# Altium PCB PCB1.pcbdoc
Units mil, origin at the board's own origin, x right, y up, seen from the top; angles counter-clockwise.
Board outline 3937.01 x 3543.31 mil, 2 copper layers (Top Layer, Bottom Layer); 47 components, 23 nets, 125 pads, 2 vias.
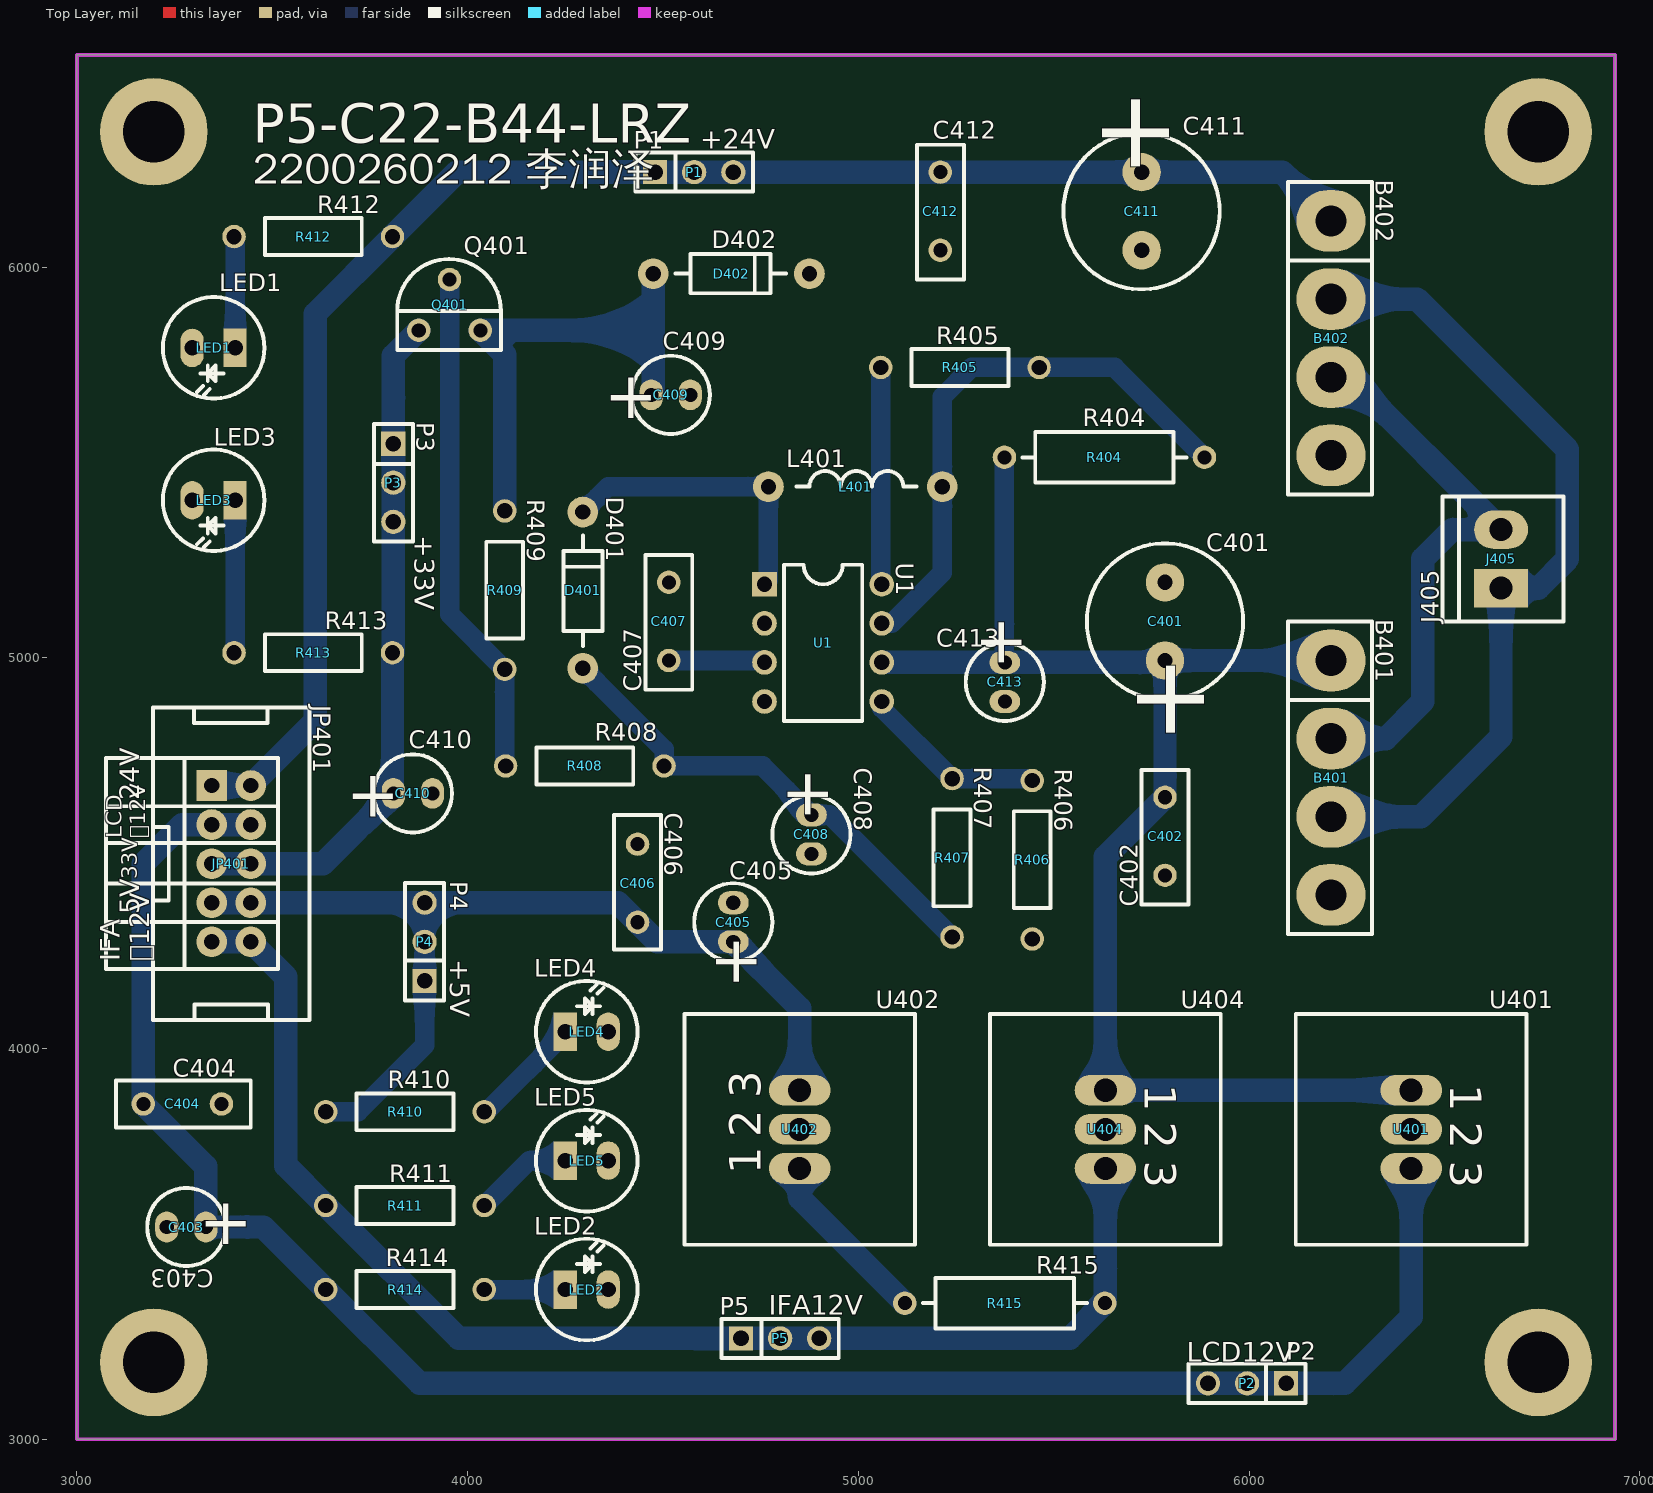
[diagram p0: Top Layer view]
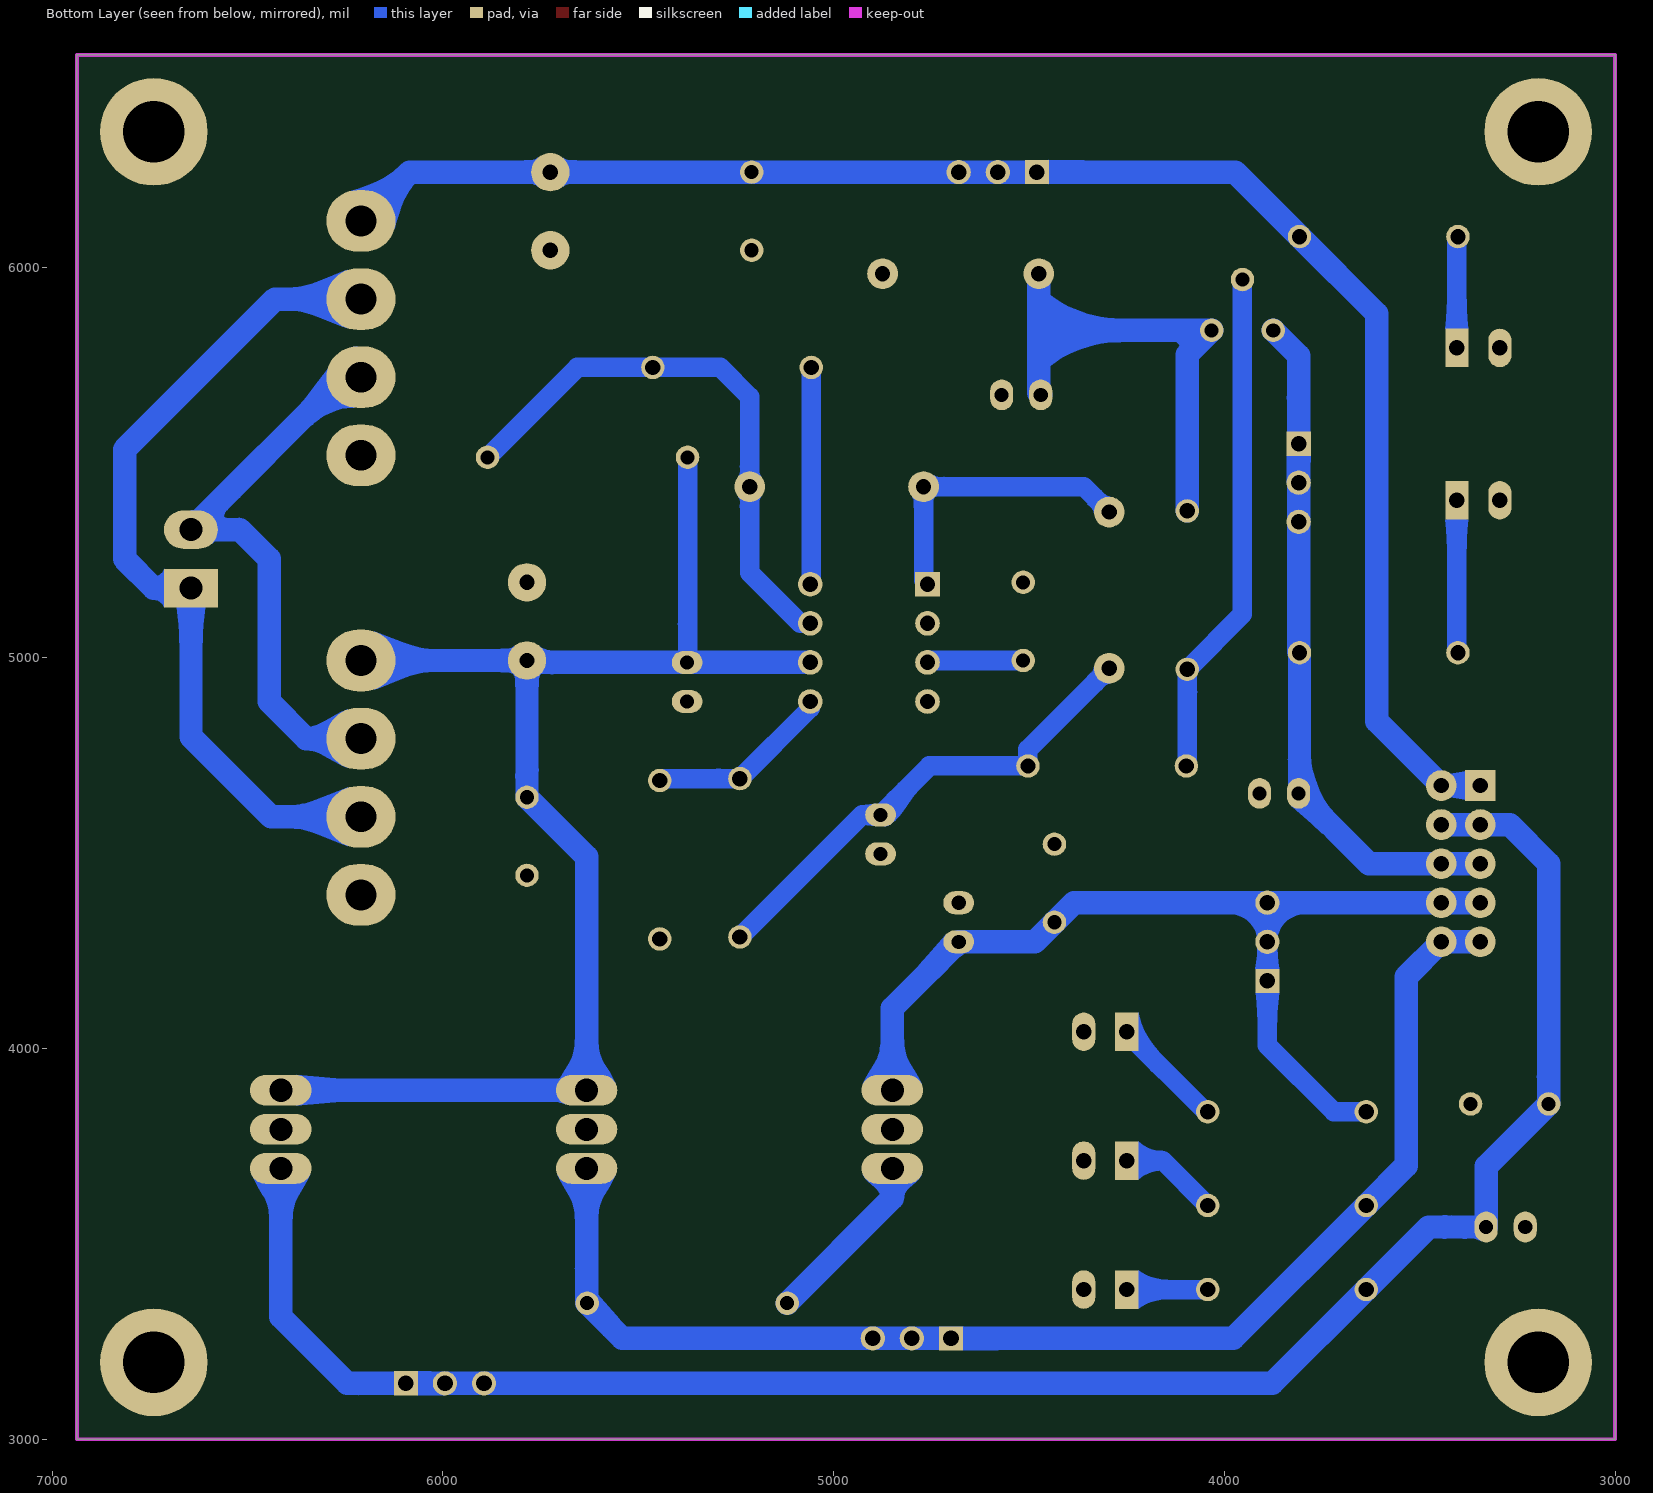
[diagram p1: Bottom Layer view, seen from below]

## Layer stack, top to bottom
Top Layer: signal copper (thickness not stored)
Dielectric: dielectric 12.6, FR-4, Dk 4.8
Bottom Layer: signal copper (thickness not stored)

## Board outline
3000,6543.31 6937.01,6543.31 6937.01,3000 3000,3000

## Design rules (kind name [scope] priority, off if disabled: settings)
BoardOutlineClearance copperThickness1oz [All] p0: genericclearance=10 ignorepadtopadclearanceinfootprint=FALSE except(0: Arc-SplitContinuation Track-SplitContinuation SMDPad-SplitContinuation THPad-SplitContinuation Via-SplitContinuation Fill-SplitContinuation Poly-SplitContinuation Region-SplitContinuation Text-SplitContinuation; 6: SMDPad-CutoutEdge THPad-CutoutEdge Via-CutoutEdge Fill-CutoutEdge Region-CutoutEdge; 11.8: Track-OutlineEdge SMDPad-OutlineEdge THPad-OutlineEdge Via-OutlineEdge Fill-OutlineEdge Region-OutlineEdge Poly-OutlineEdge Text-OutlineEdge Track-CutoutEdge)
BoardOutlineClearance copperThickness2oz [All] p0: genericclearance=10 ignorepadtopadclearanceinfootprint=FALSE except(0: Arc-SplitContinuation Track-SplitContinuation SMDPad-SplitContinuation THPad-SplitContinuation Via-SplitContinuation Fill-SplitContinuation Poly-SplitContinuation Region-SplitContinuation Text-SplitContinuation; 6: SMDPad-CutoutEdge THPad-CutoutEdge Via-CutoutEdge Fill-CutoutEdge Region-CutoutEdge; 11.8: Track-OutlineEdge SMDPad-OutlineEdge THPad-OutlineEdge Via-OutlineEdge Fill-OutlineEdge Region-OutlineEdge Poly-OutlineEdge Text-OutlineEdge Track-CutoutEdge)
Clearance copperThickness1oz [(InNet('+24V') OR InNet('$1N564') OR InNet('$1N466') OR InNet('GND') OR InNet('$1N1994') OR InNet('$1N1138') OR InNet('$1N1148') OR InNet('$1N846') OR InNet('$1N710') OR InNet('$1N1193') OR InNet('$1N1296') OR InNet('$1N1422') OR InNet('$1N1364') OR InNet('+33V') OR InNet('IFA12V') OR InNet('$1N1797') OR InNet('+5V') OR InNet('LCD12V') OR InNet('$1N3794') OR InNet('$1N3797') OR InNet('$1N3791') OR InNet('$1N3788') OR InNet('$1N3575'))] p1: gap=7 ignorepadtopadclearanceinfootprint=FALSE except(4: Track-Track; 6: Track-SMDPad SMDPad-SMDPad Track-THPad SMDPad-THPad THPad-THPad Track-Via SMDPad-Via THPad-Via Via-Via Track-Fill SMDPad-Fill THPad-Fill Via-Fill Fill-Fill SMDPad-Region THPad-Region Via-Region Fill-Region Region-Region Track-Poly SMDPad-Poly THPad-Poly Via-Poly Fill-Poly Poly-Poly Track-Text SMDPad-Text THPad-Text Via-Text Fill-Text Region-Text Poly-Text Text-Text Track-Hole SMDPad-Hole THPad-Hole Via-Hole Fill-Hole Region-Hole Poly-Hole Text-Hole; 11.8: Track-Region Region-Poly Track-Sheet SMDPad-Sheet THPad-Sheet Via-Sheet Fill-Sheet Region-Sheet Poly-Sheet Text-Sheet Sheet-Hole)
Clearance copperThickness2oz [All] p1: gap=7 ignorepadtopadclearanceinfootprint=FALSE except(6: Track-SMDPad SMDPad-SMDPad Track-THPad SMDPad-THPad THPad-THPad Track-Via SMDPad-Via THPad-Via Via-Via Track-Fill SMDPad-Fill THPad-Fill Via-Fill Fill-Fill SMDPad-Region THPad-Region Via-Region Fill-Region Region-Region Track-Poly SMDPad-Poly THPad-Poly Via-Poly Fill-Poly Poly-Poly Track-Text SMDPad-Text THPad-Text Via-Text Fill-Text Region-Text Poly-Text Text-Text Track-Hole SMDPad-Hole THPad-Hole Via-Hole Fill-Hole Region-Hole Poly-Hole Text-Hole; 8: Track-Track; 11.8: Track-Region Region-Poly Track-Sheet SMDPad-Sheet THPad-Sheet Via-Sheet Fill-Sheet Region-Sheet Poly-Sheet Text-Sheet Sheet-Hole)
DiffPairsRouting differentialPair [All] p1: maxuncoupledlength=10 minlimit=5.9843 maxlimit=5.9843 mostfreqgap=5.9843 toplayer_minwidth=5 toplayer_prefwidth=10 toplayer_maxwidth=100 bottomlayer_minwidth=5 bottomlayer_prefwidth=10 bottomlayer_maxwidth=100
PasteMaskExpansion pasteMaskExpansion [All] p1: expansion=0
PlaneConnect innerPlane [All] p1: planeconnectstyle=Relief reliefexpansion=20 reliefentries=4 reliefconductorwidth=10 reliefairgap=10
PolygonConnect copperRegion [All] p1: connectstyle=Relief reliefentries=4 reliefconductorwidth=10 polygonreliefangle="90 Angle" airgapwidth=10
PolygonConnect copperRegion1 [All] p1: connectstyle=Direct reliefentries=4 reliefconductorwidth=10 polygonreliefangle="90 Angle" airgapwidth=10
RoutingVias viaSize [All] p1: viastyle="Through Hole" holewidth=12.0078 minholewidth=11.811 maxholewidth=247.9922 width=24.0158 minwidth=19.685 maxwidth=393.7008
SolderMaskExpansion solderMaskExpansion [All] p1: useseparateexpansions=TRUE expansion=2.0079 expansionbottom=2.0079
Width copperThickness1oz [All] p1: maxlimit=100 minlimit=30 preferedwidth=40
Width copperThickness2oz [All] p1: maxlimit=100 minlimit=8 preferedwidth=10

## Components (designator, comment, footprint, x,y, rotation, side; value= is the part's Value field where it differs from the comment)
B401 "整流桥" B401/B402 6210,4993.31 r270 top
B402 "整流桥" B401/B402 6210,6118.31 r270 top
C401 "C_Ele_SMD_3x5.4mm" C401/C411 5785,4993.31 r90 top
C402 "CAP_0603" RAD-0.2 5785,4543.31 r90 top
C403 "C_Ele_SMD_3x5.4mm" 电解电容 3330,3543.31 r180 top
C404 "CAP_0603" RAD-0.2 3270,3858.31 r180 top
C405 "C_Ele_SMD_3x5.4mm" 电解电容 4680,4273.31 r90 top
C406 "CAP_0603" RAD-0.2 4435,4423.31 r270 top
C407 "CAP_0603" RAD-0.2 4515,5093.31 r90 top
C408 "C_Ele_SMD_3x5.4mm" 电解电容 4880,4598.31 r270 top
C409 "C_Ele_SMD_3x5.4mm" 电解电容 4470,5673.31 r0 top
C410 "C_Ele_SMD_3x5.4mm" 电解电容 3810,4653.31 r0 top
C411 "C_Ele_SMD_3x5.4mm" C401/C411 5725,6243.31 r270 top
C412 "CAP_0603" RAD-0.2 5210,6143.31 r90 top
C413 "C_Ele_SMD_3x5.4mm" 电解电容 5375,4988.31 r270 top
D401 "D_1N4007A" D401/D402 4295,5373.31 r270 top
D402 "D_1N4007A" D401/D402 4875,5983.31 r180 top
J405 "HDR-M_2.54_1x2P" J405 6645,5178.31 r90 top
JP401 "HDR-F_2.54_2x5" JP401 3345,4673.31 r270 top
L401 "L_0603" L401 4770,5438.31 r0 top
LED1 "LED_TH-R_3mm" LED 3405,5793.31 r180 top
LED2 "LED_TH-R_3mm" LED 4250,3383.31 r0 top
LED3 "LED_TH-R_3mm" LED 3405,5403.31 r180 top
LED4 "LED_TH-R_3mm" LED 4250,4043.31 r0 top
LED5 "LED_TH-R_3mm" LED 4250,3713.31 r0 top
P1 "HDR-F_2.54_1x3P" HDR-TH_3P-P2.54-V-F 4580,6243.31 r0 top
P2 "HDR-F_2.54_1x3P" HDR-TH_3P-P2.54-V-F 5995,3143.31 r180 top
P3 "HDR-F_2.54_1x3P" HDR-TH_3P-P2.54-V-F 3810,5448.31 r270 top
P4 "HDR-F_2.54_1x3P" HDR-TH_3P-P2.54-V-F 3890,4273.31 r90 top
P5 "HDR-F_2.54_1x3P" HDR-TH_3P-P2.54-V-F 4800,3258.31 r0 top
Q401 "S8050_SOT_NPN" Q401 3875,5838.31 r0 top
R404 "Res_AXIAL-1/4W" Res_1/2W 5630,5513.31 r180 top
R405 "Res_AXIAL-1/4W" Res_1/4W 5260,5743.31 r180 top
R406 "Res_AXIAL-1/4W" Res_1/4W 5445,4483.31 r270 top
R407 "Res_AXIAL-1/4W" Res_1/4W 5240,4488.31 r270 top
R408 "Res_AXIAL-1/4W" Res_1/4W 4300,4723.31 r180 top
R409 "Res_AXIAL-1/4W" Res_1/4W 4095,5173.31 r270 top
R410 "Res_AXIAL-1/4W" Res_1/4W 3840,3838.31 r0 top
R411 "Res_AXIAL-1/4W" Res_1/4W 3840,3598.31 r0 top
R412 "Res_AXIAL-1/4W" Res_1/4W 3605,6078.31 r180 top
R413 "Res_AXIAL-1/4W" Res_1/4W 3605,5013.31 r180 top
R414 "Res_AXIAL-1/4W" Res_1/4W 3840,3383.31 r0 top
R415 "Res_AXIAL-1/4W" Res_1/2W 5375,3348.31 r0 top
U1 "MC34063" DIP-8_L10.0-W6.5-P2.54-LS7.6-BL-A 4910,5038.31 r270 top
U401 "7812" U401/U402/U404 6415,3793.31 r270 top
U402 "7805" U401/U402/U404 4850,3793.31 r90 top
U404 "7812" U401/U402/U404 5632.5,3793.31 r270 top

## Footprints (in the part's own frame and the unit in brackets; to place one, negate y for a bottom-side part, rotate by r counter-clockwise, add the part's x,y. Pads: shape width x height; smd on the part's side, far side on the other; paste and mask are expansions set on the pad)
B401/B402 [mm]
  oval 4x4.5 hole 2: 1(15.24,0) 2(5.08,0) 3(0,0) 4(10.16,0)
  silkscreen extent -2.54,-2.79 17.78,2.67
C401/C411 [mm]
  round 2.5 hole 1: 1(0,0) 2(5.08,0)
  silkscreen extent -2.54,-5.08 7.62,5.08
D401/D402 [mm]
  round 2 hole 1: 1(10.16,0) 2(0,0)
  silkscreen extent 1.52,-1.27 8.7,1.27
DIP-8_L10.0-W6.5-P2.54-LS7.6-BL-A [mil]
  rect 63x63 hole 39.37: 1(-150,-150)
  round 63 hole 39.37: 2(-50,-150) 3(50,-150) 4(150,-150) 5(150,150) 6(50,150) 7(-50,150) 8(-150,150)
  silkscreen extent -200,-100 200,100
HDR-TH_3P-P2.54-V-F [mil]
  rect 62x62 hole 40.16: 1(-100,0)
  round 62 hole 40.16: 2(0,0) 3(100,0)
  silkscreen extent -150,-50 150,50
J405 [mm]
  rect 2.5x3.5 hole 1.5: 1(0,0)
  oval 2.5x3.5 hole 1.5: 2(3.81,0)
  silkscreen extent -2.16,-4.06 5.97,3.81
JP401 [mm]
  rect 2x2 hole 1: 1(0,0)
  round 2 hole 1: 2(0,2.54) 3(2.54,0) 4(2.54,2.54) 5(5.081,0) 6(5.081,2.54) 7(7.62,0) 8(7.62,2.54) 9(10.16,0) 10(10.16,2.54)
  silkscreen extent -5.08,-3.81 15.24,6.35
L401 [mm]
  round 2 hole 1: 1(0,0) 2(11.303,0)
  silkscreen extent 1.82,0 9.62,1.01
LED [mm]
  rect 1.5x2.5 hole 1: 1(0,0)
  oval 1.5x2.5 hole 1: 2(2.794,0)
  silkscreen extent -1.91,-3.3 4.7,3.3
Q401 [mil]
  round 60 hole 36: 1(0,0) 2(78.74,130) 3(157.48,0)
  silkscreen extent -55,-50 210,182
RAD-0.2 [mil]
  round 60 hole 36: 1(-100,0) 2(100,0)
  silkscreen extent -175,-60 170,60
Res_1/2W [mil]
  round 60 hole 36: 1(-255.91,0) 2(255.9,0)
  silkscreen extent -210,-65 210,65
Res_1/4W [mil]
  round 60 hole 39.37: 1(-202.76,0) 2(202.76,0)
  silkscreen extent -124,-47 124,47
U401/U402/U404 [mm]
  oval 2x4 hole 1.5: 1(-2.54,0) 2(0,0) 3(2.54,0)
  silkscreen extent -7.5,-7.5 7.5,7.5
电解电容 [mm]
  oval 1.5x2 hole 0.914: 1(0,0) 2(2.54,0)
  silkscreen extent -1.27,-2.54 3.81,2.54

## Free pads (board coordinates)
  round 275.59 hole 157.48: 1(3196.85,6346.46) 2(3196.85,3196.85) 3(6740.16,3196.85) 4(6740.16,6346.46)

## Via types
v1: diameter 24.02, hole 12.01, Top Layer to Bottom Layer, 2 vias

## Nets (pads, with @x,y where several pads share a name; then routed paths per layer and width w, separated by ;. In a path a pad name is that pad's centre, name@x,y a point inside that pad or via, vN(x,y) a via of type N, cw(c..) or ccw(c..) an arc to the next point about the centre after c; other vN are vias at no path point)
$1N466: B401.2 B402.4 J405.2 | length 1467
  Bottom Layer w60: B401.2 6350,4793.31 6445,4888.31 6445,5253.31 6520,5328.31 J405.2 6255,5718.31 B402.4
$1N564: B401.4 B402.2 J405.1 | length 2145.5
  Bottom Layer w60: B401.4 6440,4593.31 6645,4798.31 J405.1 6740,5178.31 6815,5253.31 6815,5533.31 6430,5918.31 B402.2
$1N710: C407.1 U1.3 | length 247.1
  Bottom Layer w50: C407.1 4755,4993.31 U1.3
$1N846: R406.1 R407.1 U1.5 | length 478.9
  Bottom Layer w50: U1.5 5060,4871.07 R407.1 5440,4691.07 R406.1
$1N1138: R405.2 U1.8 | length 556.1
  Bottom Layer w50: R405.2 5057.24,5191.07 U1.8
$1N1148: L401.2 R404.1 R405.1 U1.7 | length 1456.1
  Bottom Layer w50: U1.7 5085,5088.31 5215,5218.31 L401.2 5215,5668.31 5290,5743.31 R405.1 5655.9,5743.31 R404.1
$1N1193: D401.2 L401.1 U1.1 | length 756.1
  Bottom Layer w50: D401.2 4360,5438.31 L401.1 4770,5198.31 U1.1
$1N1296: C408.1 D401.1 R407.2 R408.1 | length 1254.6
  Bottom Layer w50: v1(4295,4973.31) 4502.76,4765.55 R408.1 4755,4723.31 C408.1 4927.24,4598.31 R407.2@5240,4285.55
$1N1364: C409.1 D402.1 Q401.3 R409.1 | length 1243.6
  Bottom Layer w60: R409.1 4095,5775.79 Q401.3 4472.94,5838.31 4475,5840.37 ; C409.1 4475,5678.31 4475,5840.37 ; v1(4475,5983.31) 4475,5840.37
$1N1422: Q401.2 R408.2 R409.2 | length 1304.4
  Bottom Layer w50: Q401.2 3953.74,5111.81 4095,4970.55 4095,4725.55 R408.2
$1N1797: R415.1 U402.1 | length 456.5
  Bottom Layer w60: U402.1 4850,3617.4 R415.1
$1N1994: B401.3 C401.1 C402.2 C413.1 R404.2 U1.6 U401.1 U404.1 | length 3624.3
  Bottom Layer w50: R404.2 5374.1,4993.31 5374.1,4989.21 C413.1
  Bottom Layer w60: U1.6 5369.1,4988.31 C413.1@5374.1,4993.31 ; C413.1 5780,4988.31 C401.1 ; B401.3 C401.1 ; U401.1 U404.1 5632.5,4490.81 C402.2 C401.1
$1N3575: LED1.1 R412.2 | length 286.1
  Bottom Layer w50: R412.2 3405,6075.55 LED1.1
$1N3788: LED2.1 R414.2 | length 207.2
  Bottom Layer w50: R414.2 LED2.1
$1N3791: LED3.1 R413.2 | length 391.1
  Bottom Layer w50: R413.2 3405,5016.07 LED3.1
$1N3794: LED4.1 R410.2 | length 293.8
  Bottom Layer w50: R410.2 4047.76,3838.31 4250,4040.55 LED4.1
$1N3797: LED5.1 R411.2 | length 254.9
  Bottom Layer w50: R411.2 4157.76,3713.31 LED5.1
+5V: C405.1 C406.2 JP401.7 JP401.8 P4.1 P4.2 P4.3 R410.1 U402.3 | length 2515
  Bottom Layer w50: R410.1 3720,3838.31 3890,4008.31 P4.1 P4.2 P4.3
  Bottom Layer w60: JP401.7 JP401.8 P4.3 4385,4373.31 C406.2 4485,4273.31 C405.1 4850,4103.31 U402.3
+24V: B402.3 C411.1 C412.2 JP401.1 JP401.2 P1.1 P1.2 P1.3 R412.1 | length 4184.7
  Bottom Layer w50: JP401.1@3340,4678.31 JP401.1
  Bottom Layer w60: JP401.1 JP401.2 3610,4838.31 3610,5880.55 R412.1 3972.76,6243.31 P1.1 P1.2 P1.3 C412.2 C411.1 6085,6243.31 B402.3
+33V: C410.1 JP401.5 JP401.6 P3.1 P3.2 P3.3 Q401.1 R413.1 | length 1753.4
  Bottom Layer w60: JP401.5 JP401.6 3629.96,4473.27 C410.1 3807.76,4655.55 R413.1 3810,5015.55 P3.3 P3.2 P3.1 3810,5773.31 Q401.1
GND: B401.1 B402.1 C401.2 C402.1 C403.2 C404.1 C405.2 C406.1 C407.2 C408.2 C409.2 C410.2 C411.2 C412.1 C413.2 D402.2 LED1.2 LED2.2 LED3.2 LED4.2 LED5.2 pad.1 pad.2 pad.3 pad.4 R406.2 U1.2 U1.4 U401.2 U402.2 U404.2
IFA12V: JP401.9 JP401.10 P5.1 P5.2 P5.3 R411.1 R415.2 U404.3 | length 3372.1
  Bottom Layer w60: JP401.9 JP401.10 3535,4183.31 3535,3700.55 R411.1 3977.24,3258.31 P5.1 P5.2 P5.3 5540.9,3258.31 R415.2 5632.5,3349.9 U404.3
LCD12V: C403.1 C404.2 JP401.3 JP401.4 P2.1 P2.2 P2.3 R414.1 U401.3 | length 5013.8
  Bottom Layer w60: JP401.4 JP401.3 3270,4573.31 3170,4473.31 C404.2 3330,3698.31 C403.1 3477.24,3543.31 R414.1 3877.24,3143.31 P2.3 P2.2 P2.1 6245,3143.31 6415,3313.31 U401.3

## Polygon pours and split planes (outlines as drawn)
GND on Bottom Layer (solid, remove dead copper, pour order 0): 3000,6543.31 6937.01,6543.31 6937.01,3000 3000,3000

## Keep-outs
Board Outline Layer:
  the board outline again, w10

## Other copper
Bottom Layer:
  region net +24V: 6113.49,6257.24 6066.99,6218.9 6072.02,6213.58 6076.75,6208.03 6081.5,6201.84 6086.22,6194.98 6091.14,6186.97 6096.16,6177.75 6101.17,6167.28 6106.49,6154.55 6112.45,6137.98 6120.45,6111.45 6124.02,6098.22 6239.93,6194.44 6216.51,6201.25 6196.21,6208.3 6179.18,6215.2 6165.11,6221.74 6153.01,6228.14 6142.85,6234.19 6134.09,6240.05 6126.65,6245.6 6120.44,6250.75 6114.99,6255.77
  region net $1N564: 6382.64,5888.31 6382.64,5948.31 6379.1,5948.4 6374.43,5948.79 6368.53,5949.61 6361.27,5951.01 6351.44,5953.45 6336.49,5957.99 6308.96,5967.98 6252.62,5990.29 6243.82,5993.31 6243.82,5843.31 6257.39,5848.1 6317.39,5871.85 6340,5879.77 6353.67,5883.76 6363.38,5886.05 6370.53,5887.32 6376.33,5888.01 6380.89,5888.28
  region net $1N466: 6335.41,5595.47 6362.21,5653.52 6357.48,5658.53 6350.23,5667.06 6331.45,5691.79 6294.27,5741.67 6281.31,5757.13 6271.73,5767.4 6264.5,5774.4 6258.45,5779.67 6253.6,5783.47 6249.36,5786.47 6245.11,5789.15 6241.48,5791.16 6238.45,5792.63 6235.43,5793.9 6232.42,5794.97 6230.01,5795.68 6227.61,5796.24 6225.21,5796.66 6222.82,5796.93 6220.44,5797.04 6219.84,5797.05 6227.32,5639.92 6231.5,5640.2 6235.78,5640.24 6241.04,5640 6246.41,5639.46 6252.78,5638.45 6259.23,5637.08 6266.67,5635.08 6275.04,5632.34 6283.35,5629.11 6292.43,5625.02 6301.24,5620.46 6309.67,5615.51 6316.87,5610.77 6323.6,5605.82 6329.15,5601.28 6333.61,5597.23
  region net $1N1994: 6037.36,5023.31 6037.36,4963.31 6040.9,4963.21 6045.57,4962.83 6051.47,4962.01 6058.73,4960.6 6068.56,4958.17 6083.51,4953.63 6111.04,4943.63 6167.38,4921.33 6176.18,4918.31 6176.18,5068.31 6162.61,5063.52 6102.61,5039.76 6080,5031.85 6066.33,5027.85 6056.62,5025.56 6049.47,5024.29 6043.67,5023.6 6039.11,5023.33
  region net $1N466: 6350,4763.31 6350,4823.31 6346.55,4823.4 6343.11,4823.69 6338.83,4824.29 6334.58,4825.15 6330.34,4826.25 6325.29,4827.85 6319.43,4830.06 6311.94,4833.38 6301.19,4838.86 6271.7,4855.63 6260.25,4861.6 6252.87,4864.94 6247.12,4867.19 6243.82,4868.31 6243.82,4718.31 6248.76,4720.03 6255.33,4722.73 6263.52,4726.64 6279.87,4735.6 6305.31,4749.94 6314.43,4754.39 6321.1,4757.22 6326.97,4759.33 6332.03,4760.83 6336.27,4761.83 6340.54,4762.6 6343.96,4763.01 6347.41,4763.25
  region net $1N564: 6382.64,4563.31 6382.64,4623.31 6379.1,4623.4 6374.43,4623.79 6368.53,4624.61 6361.27,4626.01 6351.44,4628.45 6336.49,4632.99 6308.96,4642.98 6252.62,4665.29 6243.82,4668.31 6243.82,4518.31 6257.39,4523.1 6317.39,4546.85 6340,4554.77 6353.67,4558.76 6363.38,4561.05 6370.53,4562.32 6376.33,4563.01 6380.89,4563.28
  region net $1N564: 6615,5039.09 6675,5039.09 cw(c7318.16,5039.09) 6681.33,5129.09 6608.67,5129.09 cw(c5971.84,5039.09)
  region net $1N564: 6740,5148.31 6740,5208.31 cw(c6740,5235.64) 6713.9,5227.52 6713.9,5129.09 cw(c6740,5120.97)
  region net $1N466: 6574.57,5441.16 6517.42,5413.46 6520.79,5410.26 6524.62,5406.98 6528.9,5403.69 6534.01,5400.17 6540.68,5396.06 6558.14,5386.54 6564.36,5382.94 6567.63,5380.79 6569.85,5379.18 6571.65,5377.71 6573.09,5376.41 6574.43,5375.05 6575.47,5373.88 6576.43,5372.67 6577.31,5371.41 6577.95,5370.37 6578.54,5369.29 6579.07,5368.18 6579.55,5367.03 6579.96,5365.83 6580.32,5364.6 6580.61,5363.33 6580.84,5362 6581,5360.64 6581.1,5358.86 6581.1,5357 6580.99,5355.05 6580.76,5353.02 6580.33,5350.46 6579.73,5347.76 6578.8,5344.43 6578.49,5343.44 6647.16,5377.52 6642.6,5377.64 6638.82,5377.93 6635.31,5378.4 6632.43,5378.95 6629.72,5379.62 6627.53,5380.3 6625.46,5381.06 6623.49,5381.9 6621.61,5382.83 6619.84,5383.83 6618.14,5384.91 6616.53,5386.07 6614.74,5387.51 6613.05,5389.04 6611.2,5390.9 6609.23,5393.13 6607.14,5395.76 6604.34,5399.69 6595.82,5413.31 6589.48,5423.11 6584.98,5429.29 6580.78,5434.46 6576.75,5438.92
  region net $1N466: 6520,5358.31 6520,5298.31 6525.2,5298.44 6530.79,5298.87 6537.96,5299.8 6553.5,5302.58 6558.74,5303.33 6561.81,5303.61 6564.32,5303.71 6566.82,5303.67 6568.81,5303.53 6570.8,5303.27 6572.79,5302.9 6574.78,5302.39 6576.79,5301.75 6578.81,5300.95 6580.85,5300 6582.92,5298.87 6585.02,5297.57 6587.16,5296.08 6589.89,5293.93 6592.12,5291.98 6592.12,5364.64 6589.33,5362.23 6586.62,5360.15 6584.5,5358.7 6582.4,5357.44 6580.34,5356.36 6578.3,5355.45 6576.28,5354.69 6574.28,5354.08 6572.29,5353.61 6570.3,5353.27 6568.31,5353.04 6566.32,5352.92 6563.82,5352.91 6560.79,5353.08 6556.67,5353.55 6543.42,5355.88 6534.12,5357.36 6528.04,5357.99 6522.26,5358.28
  region net $1N1296: 4927.24,4573.31 4927.24,4623.31 4924.62,4623.39 4919.54,4623.83 4898.06,4626.96 4893.53,4627.6 4893.53,4569.01 4915.04,4572.23 4922.68,4573.09 4926.41,4573.3
  region net $1N1296: 4832.79,4680.87 4787.84,4655.11 4790.41,4652.39 4794.13,4647.99 4800.83,4639.13 4823.68,4606.52 4832.32,4595.25 4838.44,4588.1 4842.58,4583.76 4846.06,4580.46 4849.56,4577.5 4852.37,4575.39 4854.49,4573.97 4856.61,4572.71 4858.74,4571.6 4860.88,4570.67 4862.3,4570.15 4863.73,4569.7 4865.15,4569.34 4866.58,4569.07 4868.01,4568.88 4869.44,4568.79 4870.16,4568.78 4870.16,4627.83 4869.29,4627.86 4868.44,4627.95 4867.61,4628.09 4866.79,4628.28 4866,4628.53 4865.22,4628.83 4864.46,4629.18 4863.71,4629.57 4862.98,4630.01 4862.27,4630.49 4860.88,4631.59 4859.55,4632.85 4858.27,4634.26 4857.04,4635.8 4855.27,4638.34 4853.59,4641.12 4851.46,4645.12 4846.95,4654.91 4841.09,4668.03 4839.04,4672.02 4837.44,4674.78 4835.77,4677.31 4834.61,4678.84 4833.41,4680.23
  region net $1N1193: 4350.58,5393.53 4315.22,5428.89 4312.1,5425.58 4306.92,5419.81 4305.41,5418.32 4304.17,5417.22 4303.2,5416.45 4302.2,5415.74 4301.16,5415.09 4300.06,5414.51 4298.91,5413.99 4297.69,5413.54 4296.4,5413.18 4295.02,5412.89 4293.56,5412.69 4292.53,5412.6 4334.29,5370.84 4334.44,5372.37 4334.67,5373.8 4334.98,5375.14 4335.38,5376.41 4335.85,5377.61 4336.39,5378.74 4336.99,5379.82 4337.66,5380.85 4338.39,5381.84 4339.45,5383.1 4340.89,5384.62 4343.43,5387.01 4349.47,5392.44
  region net $1N1296: 4315.22,4917.73 4350.58,4953.08 4347.27,4956.2 4341.5,4961.39 4340.01,4962.9 4338.91,4964.14 4338.14,4965.1 4337.43,4966.1 4336.78,4967.15 4336.2,4968.24 4335.68,4969.4 4335.24,4970.62 4334.87,4971.91 4334.58,4973.28 4334.38,4974.75 4334.29,4975.77 4292.53,4934.01 4294.06,4933.87 4295.49,4933.64 4296.84,4933.32 4298.1,4932.93 4299.3,4932.46 4300.43,4931.92 4301.51,4931.31 4302.54,4930.64 4303.53,4929.91 4304.79,4928.86 4306.32,4927.42 4308.7,4924.88 4314.14,4918.84
  region net $1N1193: 4745,5384.71 4795,5384.71 4794.87,5389.25 4794.45,5397 4794.47,5399.12 4794.57,5400.78 4794.71,5402 4794.91,5403.21 4795.19,5404.41 4795.55,5405.59 4796,5406.78 4796.55,5407.95 4797.2,5409.13 4797.97,5410.3 4798.86,5411.48 4799.53,5412.27 4740.47,5412.27 4741.45,5411.09 4742.3,5409.91 4743.03,5408.74 4743.64,5407.56 4744.16,5406.38 4744.58,5405.2 4744.91,5404.01 4745.16,5402.81 4745.35,5401.59 4745.5,5399.95 4745.55,5397.86 4745.44,5394.37 4745.02,5386.26
  region net $1N1193: 4716.4,5463.31 4716.4,5413.31 4720.95,5413.44 4728.69,5413.85 4730.81,5413.84 4732.47,5413.74 4733.69,5413.6 4734.9,5413.4 4736.1,5413.12 4737.29,5412.76 4738.47,5412.31 4739.65,5411.76 4740.82,5411.1 4741.99,5410.34 4743.17,5409.44 4743.96,5408.78 4743.96,5467.83 4742.78,5466.86 4741.6,5466.01 4740.43,5465.28 4739.25,5464.66 4738.08,5464.15 4736.89,5463.73 4735.7,5463.4 4734.5,5463.14 4733.29,5462.96 4731.65,5462.81 4729.55,5462.75 4726.07,5462.86 4717.96,5463.29
  region net $1N1148: 5190,5384.71 5240,5384.71 5239.87,5389.25 5239.45,5397 5239.47,5399.12 5239.57,5400.78 5239.71,5402 5239.91,5403.21 5240.19,5404.41 5240.55,5405.59 5241,5406.78 5241.55,5407.95 5242.2,5409.13 5242.97,5410.3 5243.86,5411.48 5244.53,5412.27 5185.47,5412.27 5186.45,5411.09 5187.3,5409.91 5188.03,5408.74 5188.64,5407.56 5189.16,5406.38 5189.58,5405.2 5189.91,5404.01 5190.16,5402.81 5190.35,5401.59 5190.5,5399.95 5190.55,5397.86 5190.44,5394.37 5190.02,5386.26
  region net $1N1148: 5240,5491.91 5190,5491.91 5190.13,5487.36 5190.55,5479.61 5190.53,5477.49 5190.43,5475.84 5190.29,5474.61 5190.09,5473.41 5189.81,5472.21 5189.45,5471.02 5189,5469.84 5188.45,5468.66 5187.8,5467.49 5187.03,5466.31 5186.14,5465.14 5185.47,5464.35 5244.53,5464.35 5243.55,5465.53 5242.7,5466.7 5241.97,5467.88 5241.36,5469.05 5240.84,5470.23 5240.42,5471.41 5240.09,5472.61 5239.84,5473.81 5239.65,5475.02 5239.5,5476.66 5239.45,5478.76 5239.56,5482.24 5239.98,5490.35
  region net $1N1994: 5399.1,5089.17 5349.1,5088.08 5349.12,5087.23 5349.31,5085.39 5349.67,5083.37 5350.51,5080.02 5352.08,5075.08 5356.36,5064.01 5365.92,5040.73 5368.2,5034.17 5369.21,5030.59 5369.72,5028.38 5370.06,5026.34 5370.22,5024.48 5370.23,5023.62 5370.2,5022.81 5370.11,5022.06 5369.96,5021.36 5369.77,5020.72 5369.51,5020.13 5369.19,5019.61 5368.82,5019.15 5368.38,5018.76 5367.87,5018.43 5367.3,5018.17 5366.66,5017.99 5365.94,5017.87 5365.16,5017.83 5384.84,5017.83 5384.04,5017.87 5383.31,5017.99 5382.66,5018.18 5382.06,5018.44 5381.54,5018.77 5381.08,5019.17 5380.68,5019.64 5380.33,5020.17 5380.05,5020.76 5379.83,5021.41 5379.65,5022.12 5379.54,5022.89 5379.47,5023.71 5379.45,5024.58 5379.55,5026.47 5379.82,5028.55 5380.51,5031.96 5381.91,5037.01 5385.28,5046.81 5394.86,5071.9 5397.06,5078.54 5398.05,5082.15 5398.74,5085.43 5399,5087.39
  region net +33V: 3717.01,4602.74 3749.59,4550.48 3776.54,4575.89 3826.35,4618.7 3828.6,4620.53 3783.86,4676.89 3778.9,4668.01 3774.39,4660.89 3770.31,4655.13 3765.71,4649.31 3760.54,4643.46 3754.21,4637.04 3732.43,4617.35
  region net $1N1994: 5662.5,4022.68 5602.5,4022.68 5602.27,4013.79 5601.72,4006.69 5600.94,4000.6 5599.9,3994.88 5598.63,3989.5 5597.14,3984.4 5595.44,3979.55 5593.38,3974.5 5590.73,3968.88 5586.82,3961.57 5572.28,3937.52 5563.81,3922.63 5557.5,3910.06 5707.5,3910.06 5701.19,3922.63 5692.47,3937.94 5678.18,3961.57 5674.27,3968.88 5671.62,3974.5 5669.56,3979.55 5667.86,3984.4 5666.37,3989.5 5665.1,3994.88 5664.06,4000.6 5663.22,4007.22 5662.7,4014.36
  region net $1N1994: 5787.37,3863.31 5787.37,3923.31 5772.44,3922.91 5743.69,3920.72 5733.89,3920.26 5726.93,3920.32 5721.29,3920.68 5716.25,3921.26 5711.06,3922.13 5705.69,3923.33 5700.07,3924.9 5693.31,3927.17 5687.04,3929.64 5687.04,3856.98 5694.18,3859.76 5700.89,3861.96 5706.47,3863.47 5711.82,3864.62 5716.98,3865.45 5722.71,3866.05 5728.32,3866.34 5735.28,3866.32 5747.99,3865.58 5775.99,3863.54
  region net IFA12V: 5602.5,3563.94 5662.5,3563.94 5662.73,3572.83 5663.28,3579.92 5664.06,3586.02 5665.1,3591.73 5666.37,3597.12 5667.86,3602.21 5669.56,3607.07 5671.62,3612.11 5674.27,3617.73 5678.18,3625.04 5692.72,3649.09 5701.19,3663.98 5707.5,3676.56 5557.5,3676.56 5563.81,3663.98 5572.53,3648.67 5586.82,3625.04 5590.73,3617.73 5593.38,3612.11 5595.44,3607.07 5597.14,3602.21 5598.63,3597.12 5599.9,3591.73 5600.94,3586.02 5601.78,3579.39 5602.3,3572.26
  region net $1N1797: 4820,3617.4 4880,3617.4 4880.05,3619.23 4880.22,3621.01 4880.48,3622.73 4880.84,3624.4 4881.3,3626.02 4881.85,3627.6 4882.48,3629.14 4883.19,3630.63 4884.26,3632.56 4885.45,3634.44 4886.76,3636.25 4888.54,3638.45 4890.87,3641.01 4894.23,3644.31 4904.39,3653.09 4911.87,3659.65 4915.41,3663.13 4917.89,3665.86 4919.84,3668.23 4921.64,3670.7 4922.96,3672.76 4924.17,3674.9 4925,3676.56 4775,3676.56 4776.12,3674.36 4777.36,3672.24 4778.71,3670.2 4780.54,3667.75 4782.51,3665.39 4785.02,3662.68 4788.58,3659.23 4799.86,3649.51 4806.2,3643.9 4809.13,3641.01 4811.46,3638.45 4813.24,3636.25 4814.55,3634.44 4815.74,3632.56 4816.81,3630.63 4817.52,3629.14 4818.15,3627.6 4818.7,3626.02 4819.16,3624.4 4819.52,3622.73 4819.78,3621.01 4819.95,3619.23
  region net +5V: 4880,4022.68 4820,4022.68 4819.77,4013.79 4819.22,4006.69 4818.44,4000.6 4817.4,3994.88 4816.13,3989.5 4814.64,3984.4 4812.94,3979.55 4810.88,3974.5 4808.23,3968.88 4804.32,3961.57 4789.78,3937.52 4781.31,3922.63 4775,3910.06 4925,3910.06 4918.69,3922.63 4909.97,3937.94 4895.68,3961.57 4891.77,3968.88 4889.12,3974.5 4887.06,3979.55 4885.36,3984.4 4883.87,3989.5 4882.6,3994.88 4881.56,4000.6 4880.72,4007.22 4880.2,4014.36
  region net +5V: 4730.56,4180.32 4782.83,4212.9 4757.42,4239.84 4714.61,4289.66 4712.77,4291.91 4656.42,4247.17 4665.29,4242.2 4672.42,4237.7 4678.18,4233.61 4684,4229.02 4689.84,4223.84 4696.26,4217.51 4715.96,4195.74
  region net $1N1994: 6260.13,3923.31 6260.13,3863.31 6375.63,3853.94 6375.63,3932.68
  region net LCD12V: 6385,3563.94 6445,3563.94 6445.23,3572.83 6445.78,3579.92 6446.56,3586.02 6447.6,3591.73 6448.87,3597.12 6450.36,3602.21 6452.06,3607.07 6454.12,3612.11 6456.77,3617.73 6460.68,3625.04 6475.22,3649.09 6483.69,3663.98 6490,3676.56 6340,3676.56 6346.31,3663.98 6355.03,3648.67 6369.32,3625.04 6373.23,3617.73 6375.88,3612.11 6377.94,3607.07 6379.64,3602.21 6381.13,3597.12 6382.4,3591.73 6383.44,3586.02 6384.28,3579.39 6384.8,3572.26
  region net LCD12V: 3441.58,3513.31 3441.58,3573.31 3430.16,3573.01 3415.07,3571.8 3393.38,3569.54 3386.6,3569.22 3381.18,3569.25 3376.39,3569.56 3372.2,3570.05 3367.91,3570.8 3363.49,3571.82 3358.92,3573.14 3354.16,3574.79 3348.32,3577.18 3343.05,3579.64 3343.05,3506.98 3349.18,3509.81 3354.96,3512.12 3359.69,3513.71 3364.24,3514.98 3368.63,3515.96 3372.9,3516.66 3377.08,3517.12 3381.86,3517.38 3387.28,3517.38 3394.75,3516.97 3419.05,3514.42 3431.98,3513.52
  region net +24V: 3445,4643.31 3445,4703.31 cw(c3445,4996.92) 3384.37,4709.64 3384.37,4636.98 cw(c3445,4349.69)
  region net $1N3575: 3430,5917.52 3380,5917.52 cw(c2756.54,5917.52) 3375.47,5842.52 3434.53,5842.52 cw(c4053.46,5917.52)
  region net $1N3788: 4145.47,3408.31 4145.47,3358.31 cw(c4145.47,3230.04) 4220.47,3334.09 4220.47,3432.52 cw(c4145.47,3536.57)
  region net $1N3791: 3380,5279.09 3430,5279.09 cw(c4053.46,5279.09) 3434.53,5354.09 3375.47,5354.09 cw(c2756.54,5279.09)
  region net $1N3794: 4167.44,3993.34 4185.87,3941.06 ccw(c4077.09,4049.85) 4220.47,3994.09 4220.47,4092.52 cw(c4030.38,4130.4)
  region net $1N3797: 4157.76,3738.31 4157.76,3688.31 cw(c4157.76,3594.99) 4220.47,3664.09 4220.47,3762.52 cw(c4157.76,3831.63)
  region net +24V: 4359,6273.31 4359,6213.31 cw(c4359,2162.85) 4449,6212.31 4449,6274.31 cw(c4359,10323.77)
  region net +24V: 4580,6213.31 4580,6273.31 ccw(c4580,6075.46) 4511,6260.89 4511,6225.73 ccw(c4580,6411.16)
  region net LCD12V: 5995,3173.31 5995,3113.31 cw(c5995,732.26) 6064,3112.31 6064,3174.31 cw(c5995,5554.35)
  region net LCD12V: 6216,3113.31 6216,3173.31 ccw(c6216,2841.06) 6126,3160.89 6126,3125.73 ccw(c6216,3445.56)
  region net +33V: 3780,5448.31 3840,5448.31 cw(c6221.04,5448.31) 3841,5517.31 3779,5517.31 cw(c1398.96,5448.31)
  region net +33V: 3840,5669.31 3780,5669.31 ccw(c4112.25,5669.31) 3792.42,5579.31 3827.58,5579.31 ccw(c3507.75,5669.31)
  region net +24V: 5658,6273.31 5658,6213.31 5670.44,6213.47 5674.31,6213.34 5677.01,6213.09 5679.11,6212.77 5681.19,6212.33 5682.72,6211.9 5684.23,6211.38 5685.72,6210.77 5687.19,6210.05 5688.65,6209.22 5690.09,6208.27 5691.51,6207.19 5692.45,6206.4 5692.45,6280.22 5691.04,6279.05 5689.61,6278.01 5688.17,6277.1 5686.7,6276.31 5685.22,6275.63 5683.73,6275.05 5682.21,6274.56 5680.67,6274.16 5678.59,6273.75 5676.47,6273.46 5673.77,6273.24 5669.31,6273.14
  region net +24V: 5792,6213.31 5792,6273.31 5779.56,6273.14 5775.69,6273.27 5772.99,6273.52 5770.89,6273.84 5768.81,6274.29 5767.28,6274.71 5765.77,6275.23 5764.28,6275.84 5762.81,6276.56 5761.35,6277.39 5759.91,6278.34 5758.49,6279.42 5757.55,6280.22 5757.55,6206.4 5758.96,6207.57 5760.39,6208.6 5761.83,6209.51 5763.3,6210.3 5764.78,6210.99 5766.27,6211.57 5767.79,6212.05 5769.33,6212.45 5771.41,6212.86 5773.53,6213.15 5776.23,6213.37 5780.69,6213.48
  region net $1N1994: 5718,5018.31 5718,4958.31 5720.91,4958.4 5723.62,4958.66 5726.74,4959.16 5733.31,4960.64 5736.26,4961.27 5738.16,4961.56 5739.56,4961.67 5740.49,4961.69 5741.41,4961.66 5742.35,4961.57 5743.28,4961.42 5744.23,4961.2 5745.19,4960.91 5746.16,4960.54 5747.15,4960.09 5748.15,4959.55 5749.19,4958.91 5750.24,4958.18 5751.89,4956.88 5752.45,4956.4 5752.45,5030.22 5750.88,5028.94 5749.14,5027.72 5747.25,5026.55 5744.17,5024.9 5740.86,5023.4 5737.39,5022.07 5733.82,5020.91 5730.24,5019.95 5726.7,5019.19 5723.27,5018.66 5720.03,5018.36
  region net $1N1994: 5755,4926.31 5815,4926.31 5814.83,4938.75 5814.97,4942.62 5815.22,4945.31 5815.53,4947.42 5815.98,4949.49 5816.41,4951.02 5816.92,4952.53 5817.54,4954.03 5818.25,4955.5 5819.09,4956.96 5820.04,4958.39 5821.12,4959.82 5821.91,4960.76 5748.09,4960.76 5749.26,4959.34 5750.29,4957.92 5751.2,4956.47 5752,4955.01 5752.68,4953.53 5753.26,4952.03 5753.75,4950.52 5754.14,4948.98 5754.56,4946.9 5754.85,4944.78 5755.07,4942.08 5755.17,4937.62
  region net $1N1994: 5852,4963.31 5852,5023.31 5839.56,5023.14 5835.69,5023.27 5832.99,5023.52 5830.89,5023.84 5828.81,5024.29 5827.28,5024.71 5825.77,5025.23 5824.28,5025.84 5822.81,5026.56 5821.35,5027.39 5819.91,5028.34 5818.49,5029.42 5817.55,5030.22 5817.55,4956.4 5818.96,4957.57 5820.39,4958.6 5821.83,4959.51 5823.3,4960.3 5824.78,4960.99 5826.27,4961.57 5827.79,4962.05 5829.33,4962.45 5831.41,4962.86 5833.53,4963.15 5836.23,4963.37 5840.69,4963.48
  region net +5V: 3865,4067.31 3915,4067.31 cw(c4450.97,4067.31) 3920.27,4142.31 3859.73,4142.31 cw(c3329.03,4067.31)
  region net +5V: 3915,4273.31 3865,4273.31 cw(c3465.25,4273.31) 3859,4204.31 3921,4204.31 cw(c4314.75,4273.31)
  region net IFA12V: 4800,3228.31 4800,3288.31 ccw(c4800,3090.46) 4731,3275.89 4731,3240.73 ccw(c4800,3426.16)
  region net IFA12V: 4579,3288.31 4579,3228.31 cw(c4579,-822.15) 4669,3227.31 4669,3289.31 cw(c4579,7338.77)
  region net $1N1994: 5815,4703.31 5755,4715.73 ccw(c5904.01,4715.73) 5764,4664.73 5806,4664.73 ccw(c5727.83,4703.31)
  region net IFA12V: 3385,4303.31 3372.57,4243.31 ccw(c3372.57,4392.32) 3423.58,4252.31 3423.58,4294.31 ccw(c3385,4216.14)
  region net +24V: 3372.57,4703.31 3385,4643.31 ccw(c3385,4730.48) 3423.58,4652.31 3423.58,4694.31 ccw(c3372.57,4554.29)
  region net $1N1994: 5692.5,3863.31 5722.5,3923.31 ccw(c5722.5,3718.81) 5662.5,3914.31 5653.92,3872.31 ccw(c5692.5,3950.48)
  region net IFA12V: 5547.65,3307.48 5590.07,3265.05 5611.29,3328.69 5662.5,3438.26
  region net $1N1193: 4745,5363.31 4795,5388.31 ccw(c4722.36,5388.31) 4787.5,5420.45 4752.5,5413.31 ccw(c4915.42,5363.31)
  region net $1N1422: 4070,4910.19 4120,4920.55 ccw(c4047.36,4920.55) 4112.5,4952.69 4077.5,4952.69 ccw(c4194.18,4910.19)
  region net LCD12V: 3200,3930.73 3140,3918.31 ccw(c3227.17,3918.31) 3149,3879.73 3191,3879.73 ccw(c3050.99,3930.73)
  region net +33V: 3777.76,4741.07 3777.64,4736.4 3777.17,4730.5 3776.21,4723.26 3774.59,4714.59 3771.86,4703.31 3768.02,4690.53 3762.96,4676.44 3757.13,4662.51 3750.64,4649.07 3744.25,4637.47 3738.77,4628.66 3733.77,4621.47 3729.32,4615.75 3725.48,4611.32 3722.91,4608.64 3765.33,4566.21 3786.55,4629.85 3837.76,4741.07
  region net $1N564: 6615,5118.31 6675,5088.31 ccw(c6470.5,5088.31) 6666,5148.31 6624,5156.88 ccw(c6702.17,5118.31)
  region net $1N466: 6551.36,5379.52 6552.77,5378.03 6554.14,5376.42 6555.76,5374.31 6556.94,5372.55 6558,5370.79 6558.91,5369.03 6559.48,5367.73 6559.94,5366.47 6560.18,5365.65 6560.37,5364.86 6560.5,5364.1 6560.57,5363.37 6560.58,5362.67 6560.56,5362.33 6560.52,5362.01 6560.46,5361.69 6560.38,5361.39 6560.29,5361.1 6560.17,5360.82 6560.04,5360.55 6559.89,5360.3 6559.72,5360.05 6559.53,5359.83 6559.31,5359.61 6559.08,5359.41 6558.82,5359.23 6558.55,5359.06 6558.25,5358.91 6557.92,5358.77 6557.58,5358.65 6557.21,5358.55 6556.82,5358.46 6556.4,5358.39 6555.49,5358.32 6555,5358.31 6555,5298.31 6615,5328.31 6593.79,5421.95
  region net $1N846: 5290,4666.07 5300.36,4716.07 ccw(c5300.36,4591.89) 5257.85,4708.57 5257.85,4673.57 ccw(c5290,4738.71)
  region net $1N1296: 4477.76,4723.31 4527.76,4723.31 ccw(c4482.34,4723.31) 4520.26,4748.31 4485.26,4741.16 ccw(c4502.76,4723.31)
  region net $1N1296: 4855,4658.66 4826.97,4615.98 ccw(c4878.33,4667.35) 4855,4598.56 4879.75,4623.31 ccw(c4767.19,4570.86)
  region net +5V: 4710,4200.88 4743.64,4252.09 ccw(c4682,4190.45) 4710,4273.01 4680.3,4243.31 ccw(c4815.37,4306.25)
  region net +5V: 3915,4273.31 3865,4273.31 ccw(c3794.81,4273.31) 3800,4343.31 3980,4343.31 ccw(c3985.19,4273.31)
  region net LCD12V: 3390,3513.31 3420,3573.31 ccw(c3420,3368.81) 3360,3564.31 3351.42,3522.31 ccw(c3390,3600.48)
  region net $1N1364: 4122.48,5808.31 4122.48,5868.31 4062.48,5838.31 4073.79,5754.57
  region net $1N1364: 4265,5808.31 4265,5868.31 ccw(c4265,6168.31) 4445,5928.31 4445,5748.31 ccw(c4265,5508.31)

## Silkscreen, mask and mechanical layers (free items; w line width, h text height)
Top Silkscreen Layer:
  lines w10: 3275,4203.31 3075.71,4203.31 3075,4204.02 3075,4324.13 ; 3275,4743.31 3075,4743.31 3075,4620.13 ; 3512.05,4525.96 3075,4525.96 ; 3513.47,4620.13 3075,4620.13 ; 3515,4324.13 3075,4324.13 ; 3515,4422.91 3075,4422.91 ; 3075,4324.13 3075,4422.91 ; 3075,4422.91 3075,4525.96 ; 3075,4525.96 3075,4620.13
  text "P5-C22-B44-LRZ" at 3450,6318.31 h100
  text "+24V" at 4595,6303.31 h50
  text "2200260212 李润泽" at 3450,6213.31 h80
  text "+33V" at 3865,5313.31 h50 r270
  text "24V" at 3160,4635.46 h50 r90
  text "LCD /  12V" at 3175,4538.31 h40 r90
  text "33V" at 3155,4433.31 h40 r90
  text "5V" at 3160,4343.31 h50 r90
  text "+5V" at 3955,4228.31 h50 r270
  text "IFA /  12V" at 3185,4223.31 h50 r90
  text "IFA12V" at 4770.3,3318.31 h50
  text "LCD12V" at 5840,3198.31 h50

## Text inside footprints (layer, text, board x,y; h text height)
C401: Top Silkscreen Layer "+" at 5885,4778.31 h200 r90
C403: Top Silkscreen Layer "+" at 3450,3603.31 h120 r180
C405: Top Silkscreen Layer "+" at 4740,4153.31 h120 r90
C408: Top Silkscreen Layer "+" at 4820,4718.31 h120 r270
C409: Top Silkscreen Layer "+" at 4350,5613.31 h120
C410: Top Silkscreen Layer "+" at 3690,4593.31 h120
C411: Top Silkscreen Layer "+" at 5625,6458.31 h200 r270
C413: Top Silkscreen Layer "+" at 5315,5108.31 h120 r270
U401: Top Silkscreen Layer "1" at 6515,3908.31 h80 r270; Top Silkscreen Layer "2" at 6515,3813.31 h80 r270; Top Silkscreen Layer "3" at 6515,3713.31 h80 r270
U402: Top Silkscreen Layer "1" at 4750,3678.31 h80 r90; Top Silkscreen Layer "2" at 4750,3773.31 h80 r90; Top Silkscreen Layer "3" at 4750,3873.31 h80 r90
U404: Top Silkscreen Layer "1" at 5732.5,3908.31 h80 r270; Top Silkscreen Layer "2" at 5732.5,3813.31 h80 r270; Top Silkscreen Layer "3" at 5732.5,3713.31 h80 r270